# Altium PCB PCB_vongcochopet.pcbdoc
Units mil, origin at the board's own origin, x right, y up, seen from the top; angles counter-clockwise.
Board outline 2585 x 2310 mil, 2 copper layers (Top Layer, Bottom Layer); 17 components, 16 nets, 78 pads, 0 vias.
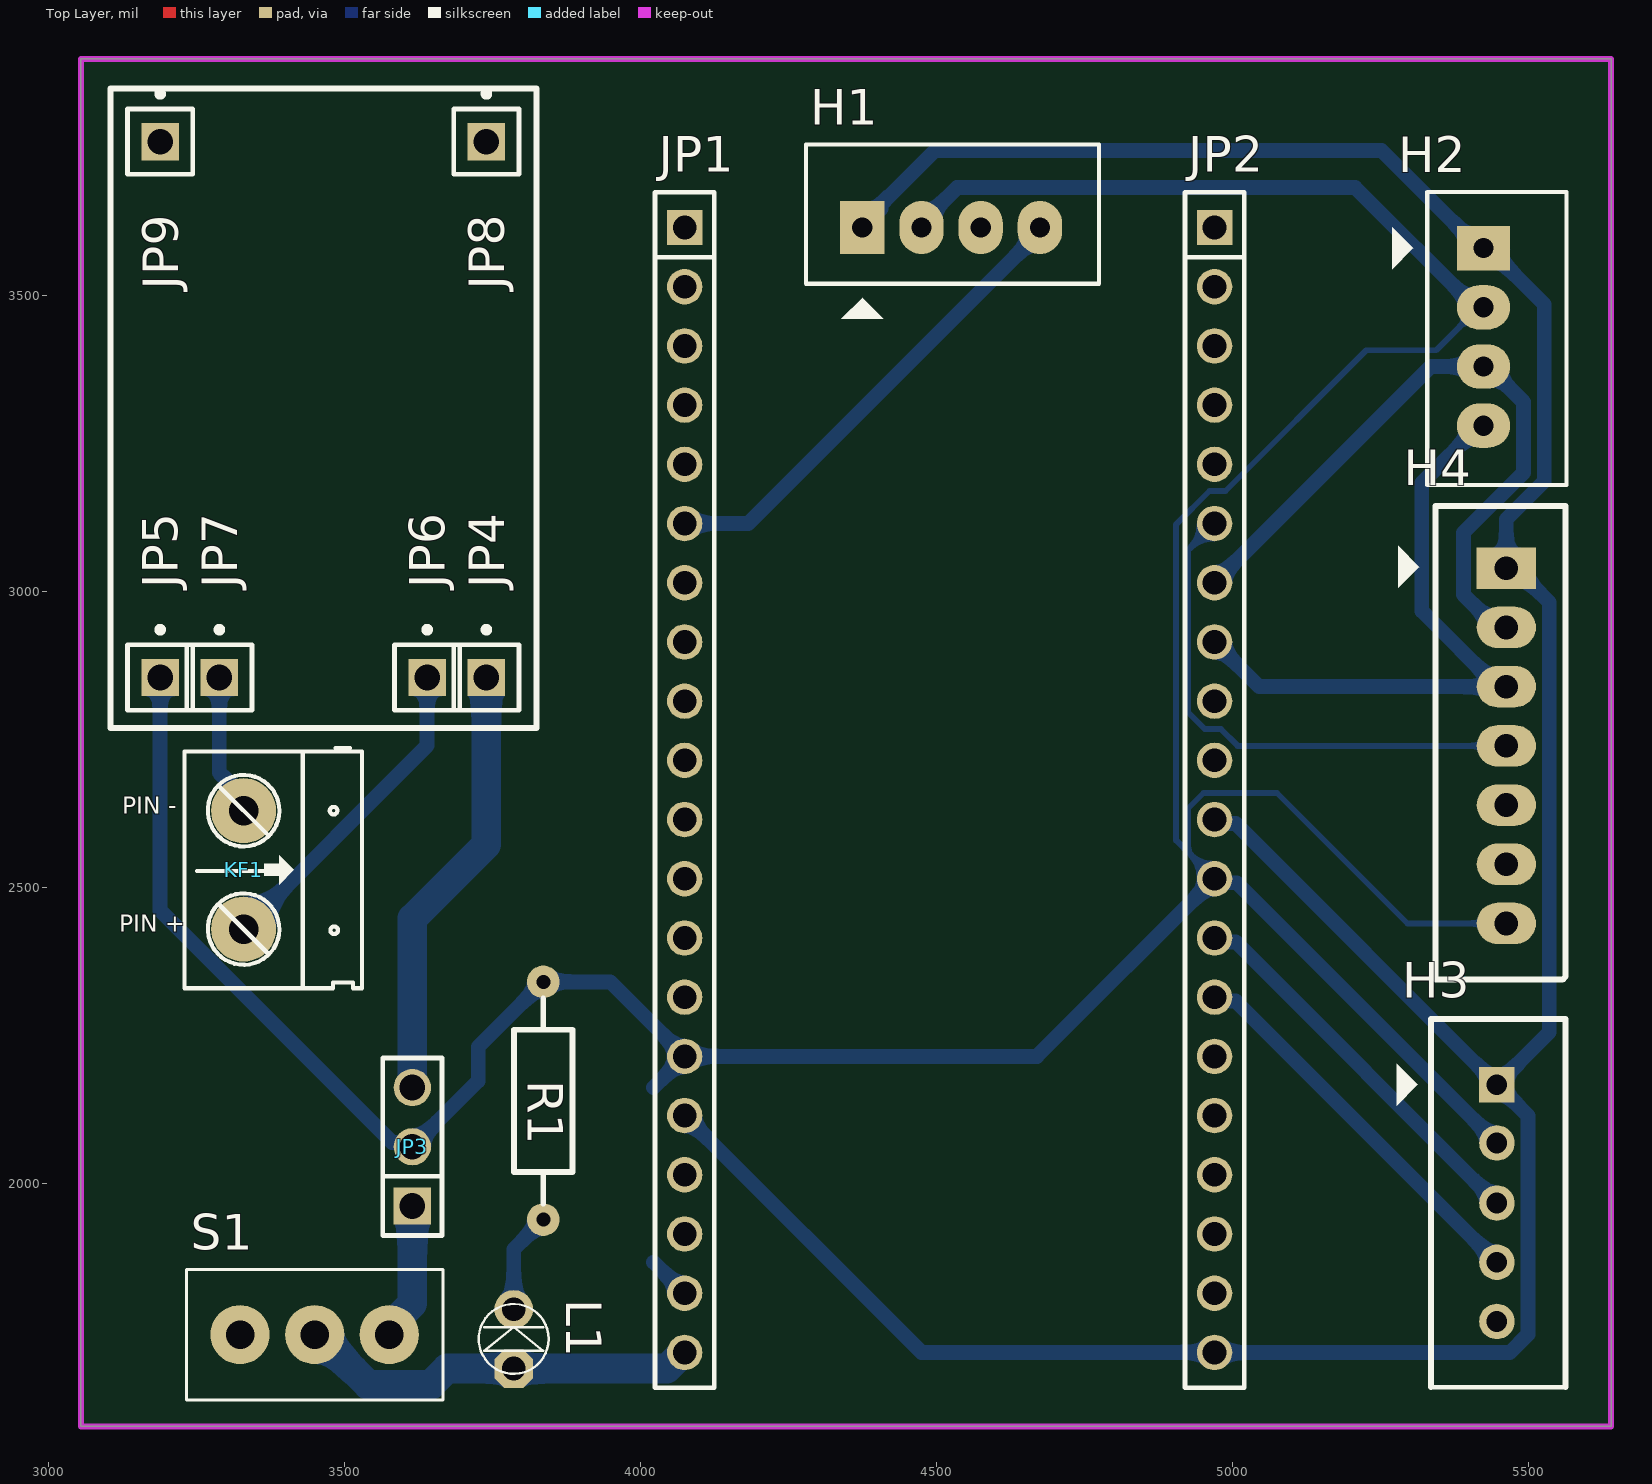
[diagram p0: Top Layer view]
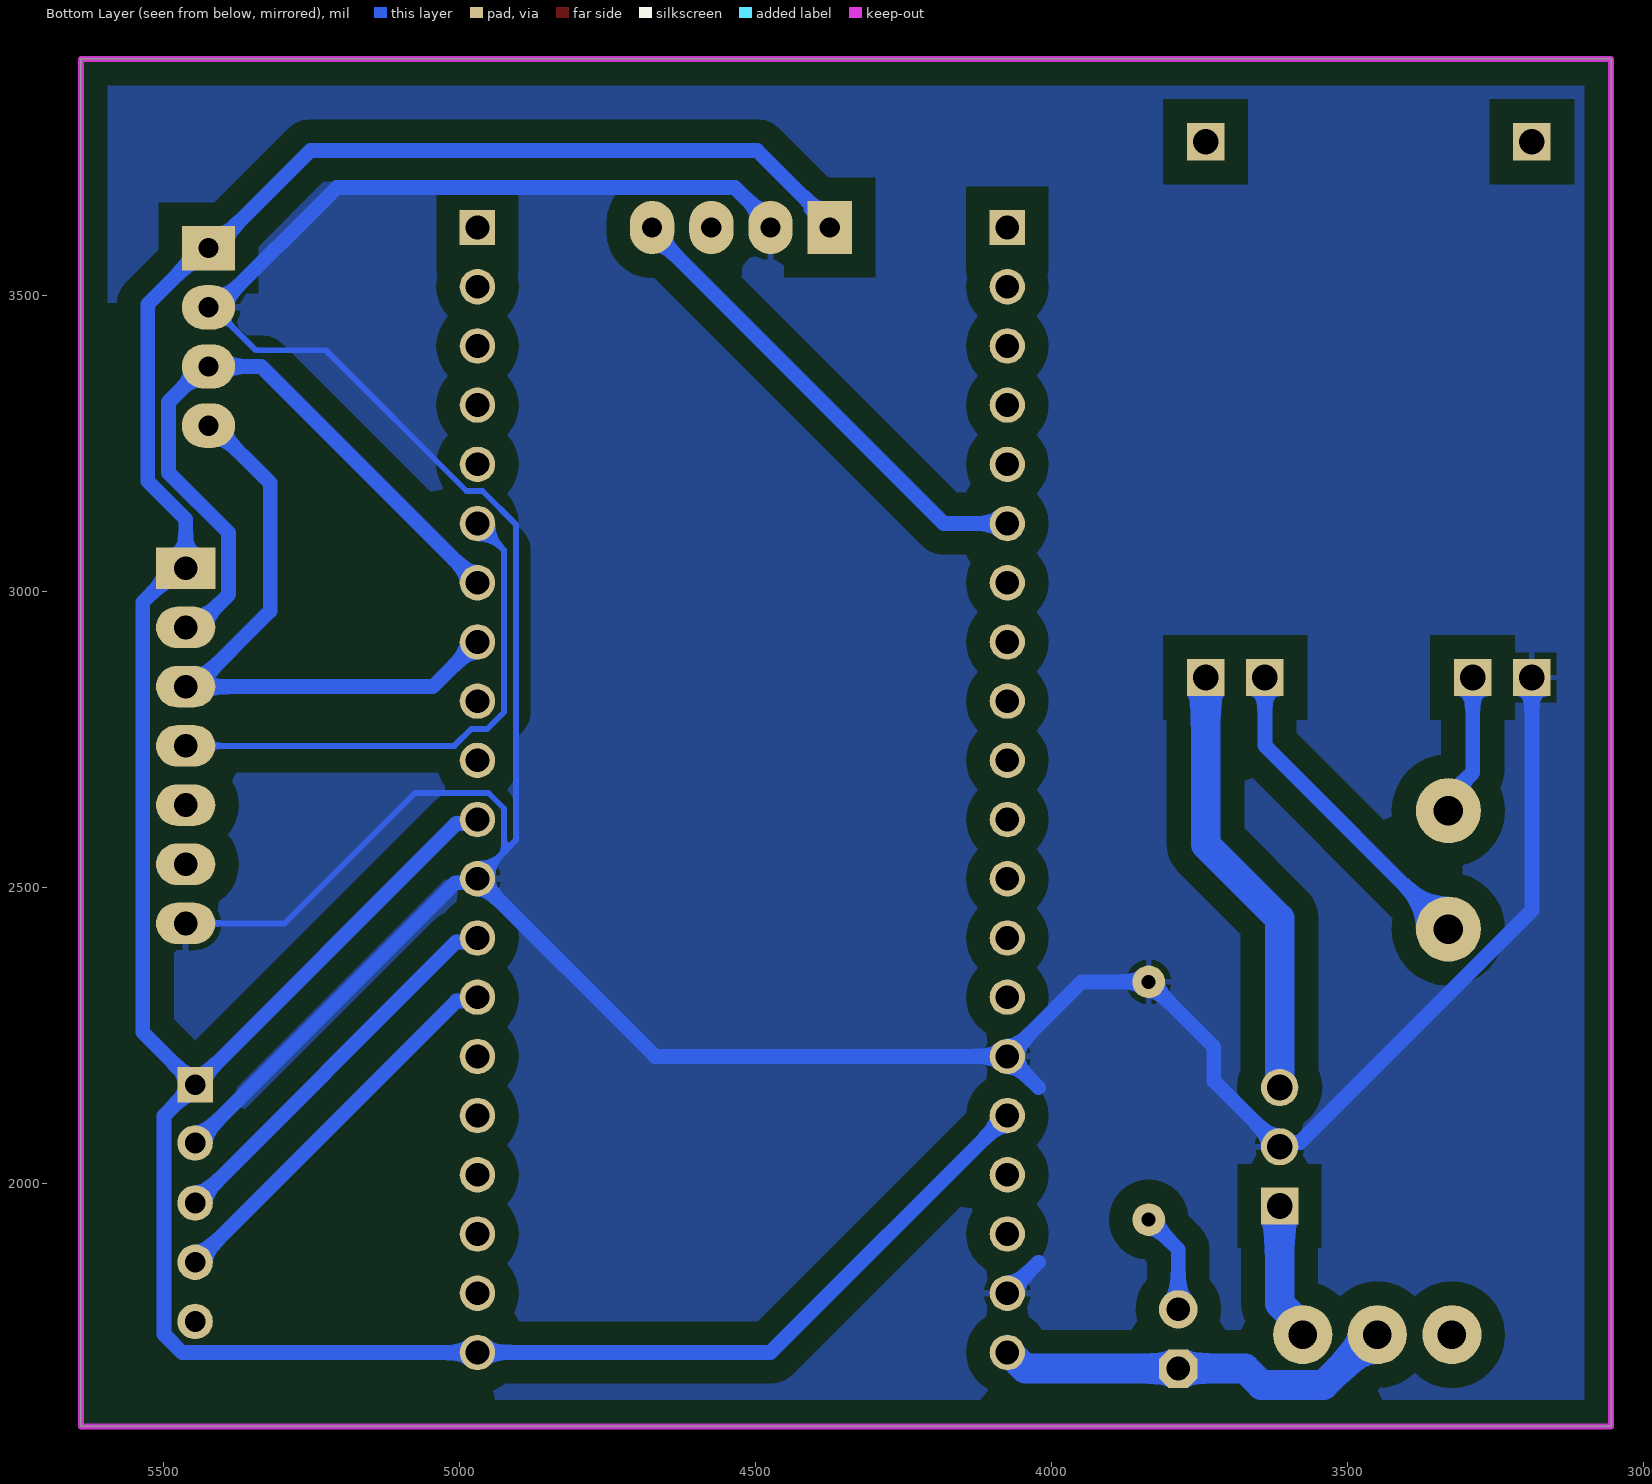
[diagram p1: Bottom Layer view, seen from below]
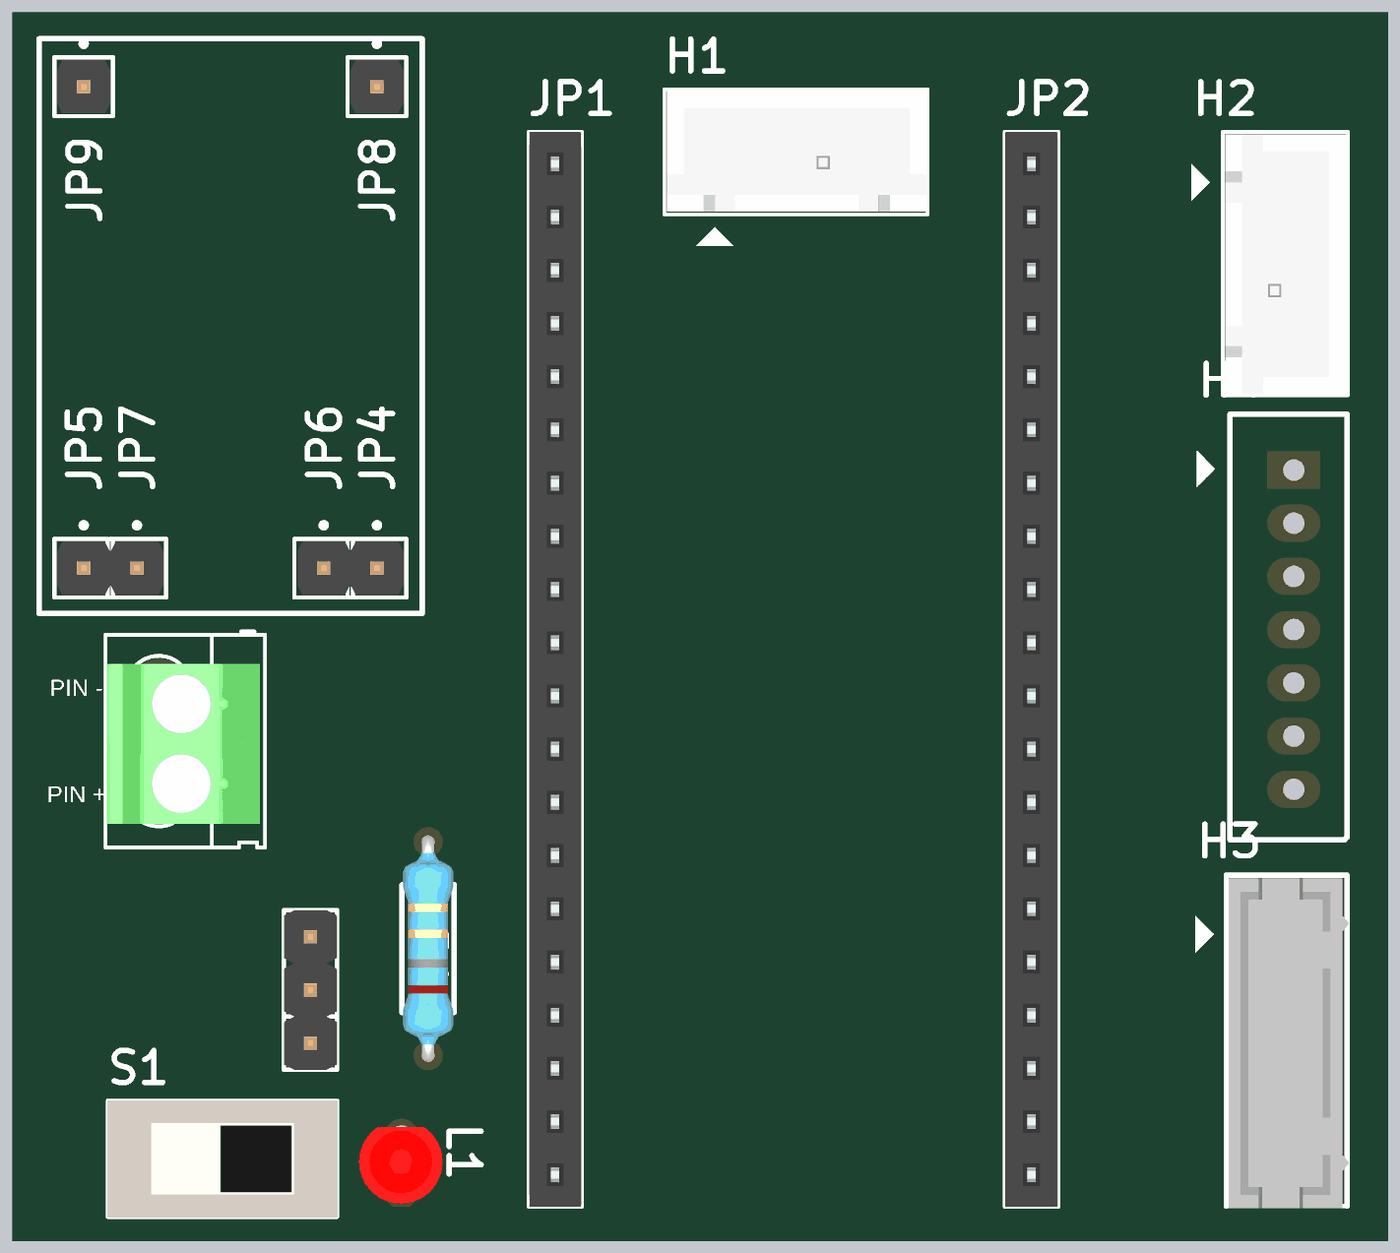
[diagram p2: 3D render of the assembled board from above, using the file's embedded part models]

## Layer stack, top to bottom
Top Solder: solder mask 0.4, Solder Resist, Dk 3.5
Top Layer: signal copper 1.4
Dielectric 1: dielectric 12.6, FR-4, Dk 4.8
Bottom Layer: signal copper 1.4
Bottom Solder: solder mask 0.4, Solder Resist, Dk 3.5

## Board outline
3055,1590 5640,1590 5640,3900 3055,3900

## Design rules (kind name [scope] priority, off if disabled: settings)
Clearance [All] p1: gap=40 ignorepadtopadclearanceinfootprint=FALSE
PolygonConnect [All] p1: connectstyle=Relief reliefconductorwidth=10 reliefentries=4 polygonreliefangle="90 Angle" airgapwidth=10
RoomDefinition SCB_vongcochopet [InComponentClass('SCB_vongcochopet')] p1: confinementstyle=ConfineIn formatcopy=TRUE lockcomponents=FALSE outline 0,0 2000,0 2000,1000 0,1000
RoutingVias [All] p1: holewidth=40 width=55 viastyle="Through Hole" minholewidth=10 minwidth=15 maxholewidth=20 maxwidth=30
SolderMaskExpansion [All] p1: expansion=4 istentingtop=FALSE
Width [All] p1: maxlimit=50 minlimit=10 preferedwidth=25
30 further rules are at their usual default settings.

## Components (designator, comment, footprint, x,y, rotation, side; value= is the part's Value field where it differs from the comment)
H1 "MQ7" "Header DT 4P_2.54" 4375,3615 r90 top
H2 "THAN NHIET" "Header DT 4P_2.54" 5424.39,3580.27 r0 top
H3 "GPS" "Header DT 5P_2.54" 5446.89,2167.21 r0 top
H4 "MAX30100" "Header DT 7P_2.54" 5462.89,3039.52 r180 top
JP1 "esp trai" "JP 1x20 CT" 4075,3615 r270 top
JP2 "esp phai" "JP 1x20 CT" 4970,3615 r270 top
JP3 "BOOST" "JP 1x3 DT" 3615.1,1962.34 r90 top
JP4 "JP 1x1 2.54" "JP 1x1 DT" 3740,2855 r0 top
JP5 "JP 1x1 2.54" "JP 1x1 DT" 3189,2855 r0 top
JP6 "JP 1x1 2.54" "JP 1x1 DT" 3640,2855 r0 top
JP7 "JP 1x1 2.54" "JP 1x1 DT" 3289,2855 r0 top
JP8 "JP 1x1 2.54" "JP 1x1 DT" 3740,3760 r0 top
JP9 "JP 1x1 2.54" "JP 1x1 DT" 3189,3760 r0 top
KF1 "PIN" "Con 2 KF301 5.08" 3330,2630 r270 top
L1 "LED 3mm" LED-3MM-RED 3786.17,1687.71 r90 top
R1 "330R" "tro vach 1/4w" 3836.17,2140 r270 top
S1 "ON-ON" SWITCH_SPDT_SLIDER 3450,1745 r180 top

## Footprints (in the part's own frame and the unit in brackets; to place one, negate y for a bottom-side part, rotate by r counter-clockwise, add the part's x,y. Pads: shape width x height; smd on the part's side, far side on the other; paste and mask are expansions set on the pad)
"Con 2 KF301 5.08" [mil]
  round 110 hole 50 mask+4: 1(0,0) 2(200,0)
  silkscreen extent -106,-100 300,200, body extent -45,-97 255,190, height 335
"Header DT 4P_2.54" [mil]
  rect 90x75 hole 34 mask+4: 1(0,0)
  oval 90x75 hole 34 mask+4: 2(0,-100) 3(0,-200) 4(0,-300)
  silkscreen extent -154,-400 140,95, body extent -90,-398 136,90, height 276
"Header DT 5P_2.54" [mil]
  rect 60x60 hole 35 mask+4: 1(0,0)
  round 60 hole 35 mask+4: 2(0,-98.43) 3(0,-200) 4(0,-300) 5(0,-400)
  silkscreen extent -170,-511 116,111, body extent -106,-515 120,105, height 570
"Header DT 7P_2.54" [mil]
  rect 100x70 hole 40 mask+4: 1(0,0)
  oval 100x70 hole 40 mask+4: 2(0,100) 3(0,200) 4(0,300) 5(0,400) 6(0,500) 7(0,600)
  silkscreen extent -100,-105 183,695
"JP 1x1 DT" [mm] "1pins, 1 row, straight, gold plating"
  rect 1.6x1.6 hole 1.1 mask+0.102: 1(0,0)
  silkscreen extent -1.4,-1.4 1.4,2.17, body extent -1.27,-1.27 1.27,1.27, height 8.54
"JP 1x3 DT" [mm]
  rect 1.6x1.6 hole 1.1 mask+0.102: 1(0,0)
  round 1.6 hole 1.1 mask+0.102: 2(2.54,0) 3(5.08,0)
  silkscreen extent -1.27,-1.27 6.35,1.27, body extent -1.27,-1.27 6.35,1.27, height 8.54
"JP 1x20 CT" [mm] "20 row, straight, gold plating"
  rect 1.52x1.52 hole 1.02 mask+0.102: 1(0,0)
  round 1.52 hole 1.02 mask+0.102: 2(2.54,0) 3(5.08,0) 4(7.62,0) 5(10.16,0) 6(12.7,0) 7(15.24,0) 8(17.78,0) 9(20.32,0) 10(22.86,0) 11(25.4,0) 12(27.94,0) 13(30.48,0) 14(33.02,0) 15(35.56,0) 16(38.1,0) 17(40.64,0) 18(43.18,0) 19(45.72,0) 20(48.26,0)
  silkscreen extent -1.52,-1.27 49.78,1.27, body extent -1.52,-1.25 49.78,1.25, height 8.51
LED-3MM-RED [mil]
  oct 65x65 hole 40 mask+4: 1(0,0)
  round 65 hole 40 mask+4: 2(100,0)
  silkscreen extent -9,-59 109,59, body extent -27,-77 117,80, height 181
SWITCH_SPDT_SLIDER [mil] "TE Connectivity SLS121PC04 SPDT slider"
  round 100 hole 48 mask+4: 1(-126,0) 2(0,0) 3(126,0)
  silkscreen extent -217,-110 217,110, body extent -216,-110 217,110, height 394
"tro vach 1/4w" [mm]
  round 1.4 hole 0.6 mask+0.102: 1(-5.1,0) 2(5.1,0)
  silkscreen extent -4.39,-1.25 4.42,1.25, body extent -5.38,-1.2 5.38,1.2, height 2.41

## Part data
H1 H2: library part "Header 4P 2.54 Duc Thang", "Cắm", Chung_Loai=Cắm, Don_Vi=Con, Ma_Hang=MH001285, Ten_Linh_Kien="Header 4P XH2.54-4P Đực Thẳng"
H3: library part "Header 5P 2.54 Duc Thang", "Cắm", Chung_Loai=Cắm, Don_Vi=Con, Ma_Hang=MH001298, Ten_Linh_Kien="Header 5P XH2.54-5P Đực Thẳng"
H4: library part "Header 7P 2.54 Duc Thang", "Cắm", Chung_Loai=Cắm, Don_Vi=Con, Ma_Hang=MH003369, Ten_Linh_Kien="Header 7P XH2.54-7P Đực Thẳng"
JP1 JP2: library part "JP 1x20 2.54 Cai Thang", "Cắm", Chung_Loai=Cắm, Don_Vi=Con, Ma_Hang=MH004006, Ten_Linh_Kien="Jump Đơn Cái 2.54MM 1x20P Thẳng"
JP3: library part "JP 1x3 2.54 Duc Thang", "Cắm", Chung_Loai=Cắm, Don_Vi=Con, Ma_Hang=MH000903, Ten_Linh_Kien="Jump Đơn Đực 2.54MM 1x40P Thẳng 11MM"
JP4 JP5 JP6 JP7 JP8 JP9: library part "JP 1x1 2.54 Duc Thang", "Cắm", Chung_Loai=Cắm, Don_Vi=Con, Ma_Hang=MH000903, Ten_Linh_Kien="Jump Đơn Đực 2.54MM 1x40P Thẳng 11MM"
KF1: library part "CON 2 KF301", "Cắm", Chung_Loai=Cắm, Don_Vi=Con, Ma_Hang=MH000987, Ten_Linh_Kien="CON 2 KF301-2P 5.08MM Xanh Dương"
L1: library part "LED 3mm Do", "Cắm", Chung_Loai=Cắm, Don_Vi=Con, Ma_Hang=MH003892, Ten_Linh_Kien="Led 3MM Phủ Đỏ (10c)"
R1: library part "Tro Vach 1/4W 5% 330R", "Cắm", Chung_Loai=Cắm, Don_Vi=Con, Ma_Hang=MH007436, So_Chan=2, Ten_Linh_Kien="Trở Vạch 1/4W 5% 330R"
S1: library part SW_THD_SPDT_On-On, "Switch THD vertical toggle SPDT", Contact Rating @ Voltage="0.25A @ 125VAC", Manufacturer 1="TE Connectivity", Manufacturer Part Number 1=SLS121PC04, Supplier Part Number 1=450-1598-ND, Circuit=SPDT, Mounting Type="PCB mount", SCDType=spec, Supplier 1=Digi-Key, Switch Function=On-On

## Nets (pads, with @x,y where several pads share a name; then routed paths per layer and width w, separated by ;. In a path a pad name is that pad's centre, name@x,y a point inside that pad or via, vN(x,y) a via of type N, cw(c..) or ccw(c..) an arc to the next point about the centre after c; other vN are vias at no path point)
3.3V: H1.1 H2.1 H3.1 H4.1 JP1.16 JP2.11 JP2.20 | length 5491.7
  Bottom Layer w25: JP1.16 4475,1715 JP2.20 4970.29,1714.71 5468.63,1714.71 5499.39,1745.47 5499.39,2114.71 H3.1 ; H1.1@4406.96,3646.96 H1.1 4375,3622.5 4497.5,3745 5252.16,3745 5416.89,3580.27 H2.1 5431.89,3580.27 5526.89,3485.27 5526.89,3186.42 5462.89,3122.42 H4.1 5477.89,3039.52 5535.39,2982.02 5535.39,2255.71 H3.1 ; JP2.11 4976.67,2608.33 5005.77,2608.33 H3.1
A0: H1.4 JP1.6 | length 811.5
  Bottom Layer w25: JP1.6 4182.5,3115 4675,3607.5 H1.4
B+: JP6.1 KF1.2 | length 553.4
  Bottom Layer w25: KF1.2 3640,2740 JP6.1
B-: JP7.1 KF1.1 | length 242
  Bottom Layer w25: JP7.1 3289,2694 3330,2653 KF1.1
D0: H4.4 JP2.6 | length 898.6
  Bottom Layer w10: JP2.6 4925.08,3070.08 4925.08,2796.39 4953.51,2767.96 4980.57,2767.96 5009.01,2739.52 H4.4
D5: H3.3 JP2.13 | length 662.4
  Bottom Layer w25: JP2.13 4976.67,2408.33 5005.77,2408.33 H3.3
D6: H3.4 JP2.14 | length 662.4
  Bottom Layer w25: JP2.14 4976.67,2308.33 5005.77,2308.33 H3.4
GND: H1.2 H2.2 H3.2 H4.7 JP1.15 JP1.19 JP2.12 JP3.2 JP5.1 R1.1 | length 6543.6
  Bottom Layer w10: JP2.12 4925.08,2559.92 ; H2.2 5416.89,3480.27 5344.39,3407.77 5226.3,3407.77 4988.61,3170.08 4961.55,3170.08 4905.08,3113.61 4905.08,2579.92 4925.08,2559.92 ; H4.7 5295.98,2439.52 5075.58,2659.92 4951.39,2659.92 4925.08,2633.61 4925.08,2559.92
  Bottom Layer w25: JP5.1 3189,2461.4 3580.79,2069.61 3607.83,2069.61 JP3.2 3726.39,2173.63 3726.39,2231 R1.1 3949.21,2340.79 JP1.15 ; 4022.58,1867.42 JP1.19 ; 4022.58,2162.58 JP1.15 ; H1.2 4475,3622.5 4535,3682.5 5207.84,3682.5 5410.07,3480.27 H2.2@5416.89,3480.27 ; H3.2 5007.34,2508.33 4976.67,2508.33 JP2.12 4670,2215 JP1.15
IN+: JP8.1
IN-: JP9.1
NetJP3_1: JP3.1 S1.1 | length 233.5
  Bottom Layer w50: S1.1 3576,1758.53 3615.1,1797.63 JP3.1
NetL1_2: L1.2 R1.2 | length 172.2
  Bottom Layer w25: L1.2 3786.17,1889.21 R1.2
OUT+: JP3.3 JP4.1 | length 744.4
  Bottom Layer w50: JP3.3 3615.1,2447.98 3740,2572.88 JP4.1
SCL: H2.3 H4.2 JP2.7 | length 1175.7
  Bottom Layer w25: JP2.7 5335.27,3380.27 H2.3 5431.89,3380.27 5491.89,3320.27 5491.89,3200.91 5390.39,3099.41 5390.39,2995.2 5446.07,2939.52 H4.2 H4.2@5477.89,2939.52
SDA: H2.4 H4.3 JP2.8 | length 1080.5
  Bottom Layer w25: JP2.8 5045.48,2839.52 H4.3@5447.89,2839.52 ; H2.4 5416.89,3280.27 5320,3183.39 5320,2967.41 H4.3@5447.89,2839.52 ; H4.3@5477.89,2839.52 H4.3 H4.3@5447.89,2839.52
VIN: JP1.20 L1.1 S1.2 | length 693.3
  Bottom Layer w50: S1.2@3450,1734.66 S1.2 3455.79,1745 3540.79,1660 3645.87,1660 3673.59,1687.71 L1.1 4045.05,1687.71 4072.34,1715 JP1.20
pads on no net: H1.3 H3.5 H4.5 H4.6 JP1.1 JP1.2 JP1.3 JP1.4 JP1.5 JP1.7 JP1.8 JP1.9 JP1.10 JP1.11 JP1.12 JP1.13 JP1.14 JP1.17 JP1.18 JP2.1 JP2.2 JP2.3 JP2.4 JP2.5 JP2.9 JP2.10 JP2.15 JP2.16 JP2.17 JP2.18 JP2.19 S1.3

## Polygon pours and split planes (outlines as drawn)
GND on Bottom Layer "GND_L02_P000" (solid, remove dead copper, pour order 0): 3055,1590 5640,1590 5640,3900 5635,3905 3060,3905 3060,1595

## Keep-outs
Keep-Out Layer:
  the board outline again, w10

## Silkscreen, mask and mechanical layers (free items; w line width, h text height)
Top Overlay:
  lines w10: 3105,2770 3105,3850 3825,3850 3825,2770 3105,2770
  text "PIN -" at 3125,2615 h50
  text "PIN +" at 3120,2415 h50